# EAGLE board Button_PCB_for_BikeLapse_Camera_Trigger_v16 (EAGLE 9.7.0)
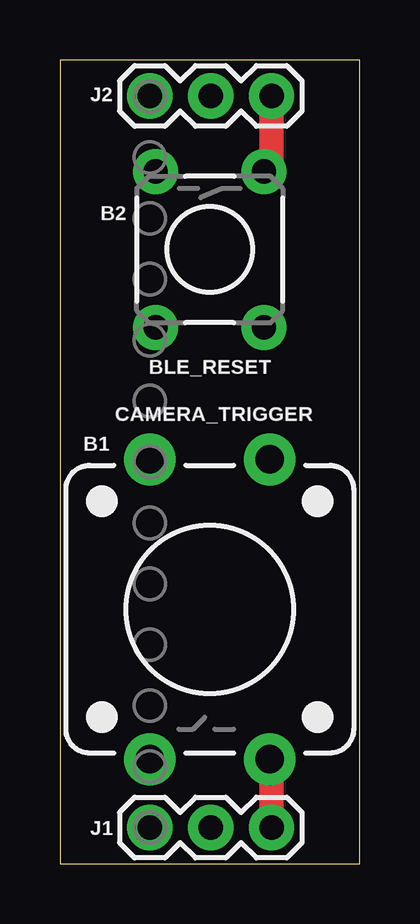
[diagram p0: board, top side]
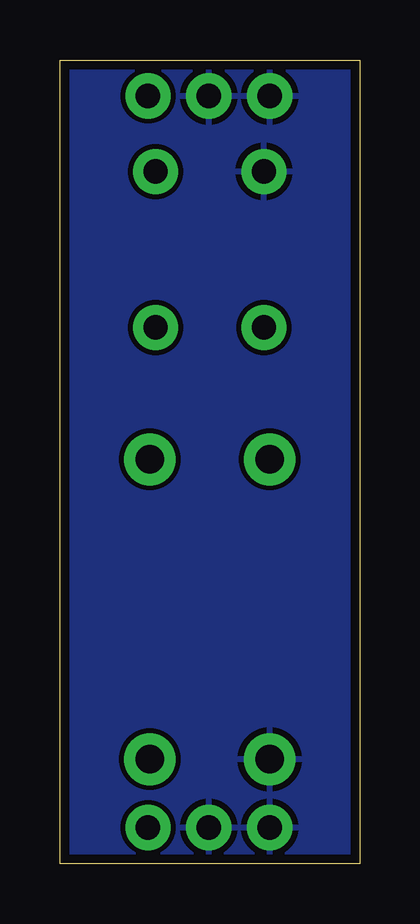
[diagram p1: board, bottom side, seen from below]

Size 12.5 x 33.5 mm. Coordinates in mm from the lower left corner, seen from the top.
Outline: 0,0 12.5,0 12.5,33.5 0,33.5 0,0
Copper layers (1*16): Top 0.035mm / dielectric 1.5mm / Bottom 0.035mm
Design rules "TKs_CustomDRU": minimum track width 10mil, minimum drill 20mil, track to track 8mil, track to pad 8mil, pad to pad 8mil, via to via 8mil, smd to smd 8mil, copper to edge 15mil, drill to drill 15mil, minimum pad ring 12mil, minimum via ring 10mil, stop-mask expansion 4mil, vias tented up to drill 20mil, thermal gap 10mil

## Footprints (pad centres in the part's own frame; a part is rotated, then mirrored left to right if it is on the bottom)
TACTILE_SWITCH_PTH_12MM = drill 1.2 pad 2.159: 1 6.25,-2.5; 2 -6.25,-2.5; 3 6.25,2.5; 4 -6.25,2.5
TACTILE_SWITCH_PTH_6.0MM = drill 1.016 pad 1.88: 1 -3.251,2.261; 2 3.251,2.261; 3 -3.251,-2.261; 4 3.251,-2.261
1X03-MALE_HEADERS_BOTTOM = drill 1.016 pad 1.88: 1 0,0; 2 2.54,0; 3 5.08,0

## Placement (x,y rotation side)
B1  CAMERA_TRIGGER  [TACTILE_SWITCH_PTH_12MM]  6.25,10.6 270 top
B2  BLE_RESET  [TACTILE_SWITCH_PTH_6.0MM]  6.25,25.6 270 top
J1  455-1750-1-ND  [1X03-MALE_HEADERS_BOTTOM]  3.75,1.5 0 top
J2  455-1750-1-ND  [1X03-MALE_HEADERS_BOTTOM]  3.75,32 0 top

## Library data of the parts
B1 = Distance_Lapse_Camera_Trigger; PROD_ID: SWCH-09185; SF_SKU: COM-09190
B2 = Distance_Lapse_Camera_Trigger; PROD_ID: SWCH-08441; SF_SKU: COM-00097
J1 J2 = Distance_Lapse_Camera_Trigger

## Nets
GND: B1.1 B2.3 J1.1 J1.2 J2.1 J2.2
N$2: B2.1 J2.3
N$3: B1.3 J1.3

## Tracks (layer width: path | path; a pad name or v marks a point on that pad's centre or on a via)
GND
  pour Bottom: 0.07,0.07 12.43,0.07 12.43,33.42 0.07,33.42
N$2
  Top 1.016: J2.3 8.83,29.17 B2.1
N$3
  Top 1.016: J1.3 8.83,4.27 B1.3